# Altium PCB Buck Converter.PcbDoc
Units mm, origin at the board's own origin, x right, y up, seen from the top; angles counter-clockwise.
Board outline 50.25 x 28.75 mm, 2 copper layers (Top Layer, Bottom Layer), stack 1.571 mm thick; 6 components, 5 nets, 21 pads, 16 vias.
Unrouted connection lines stored in the file: 24.
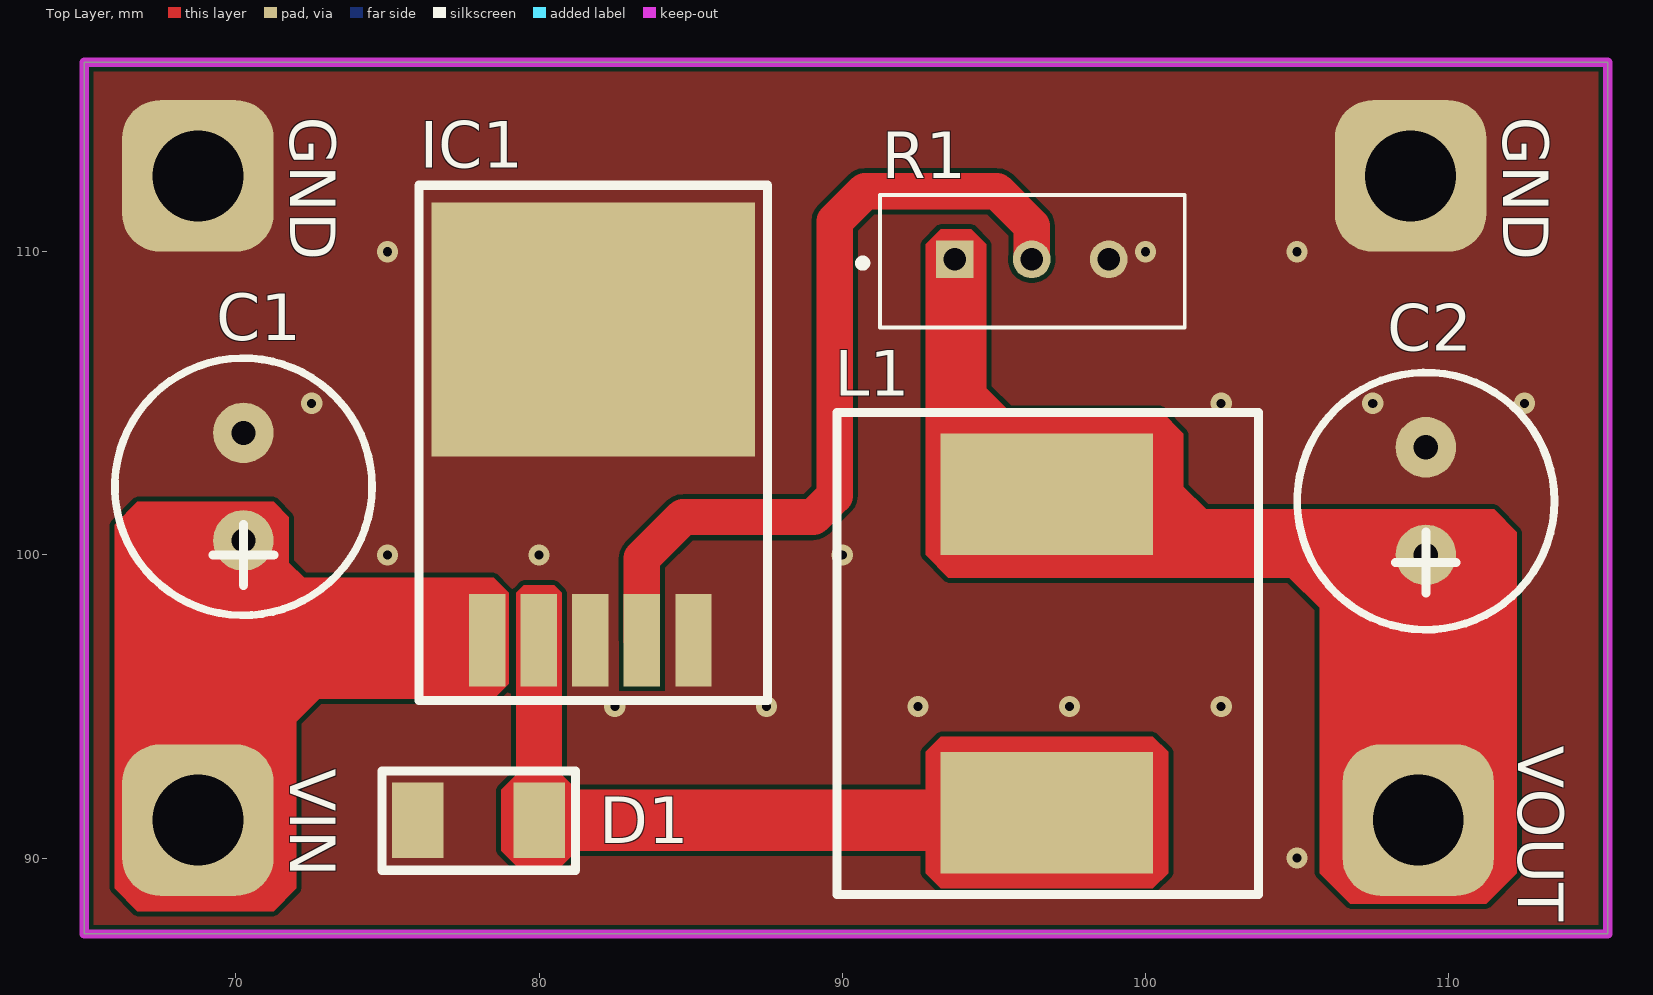
[diagram p0: Top Layer view]
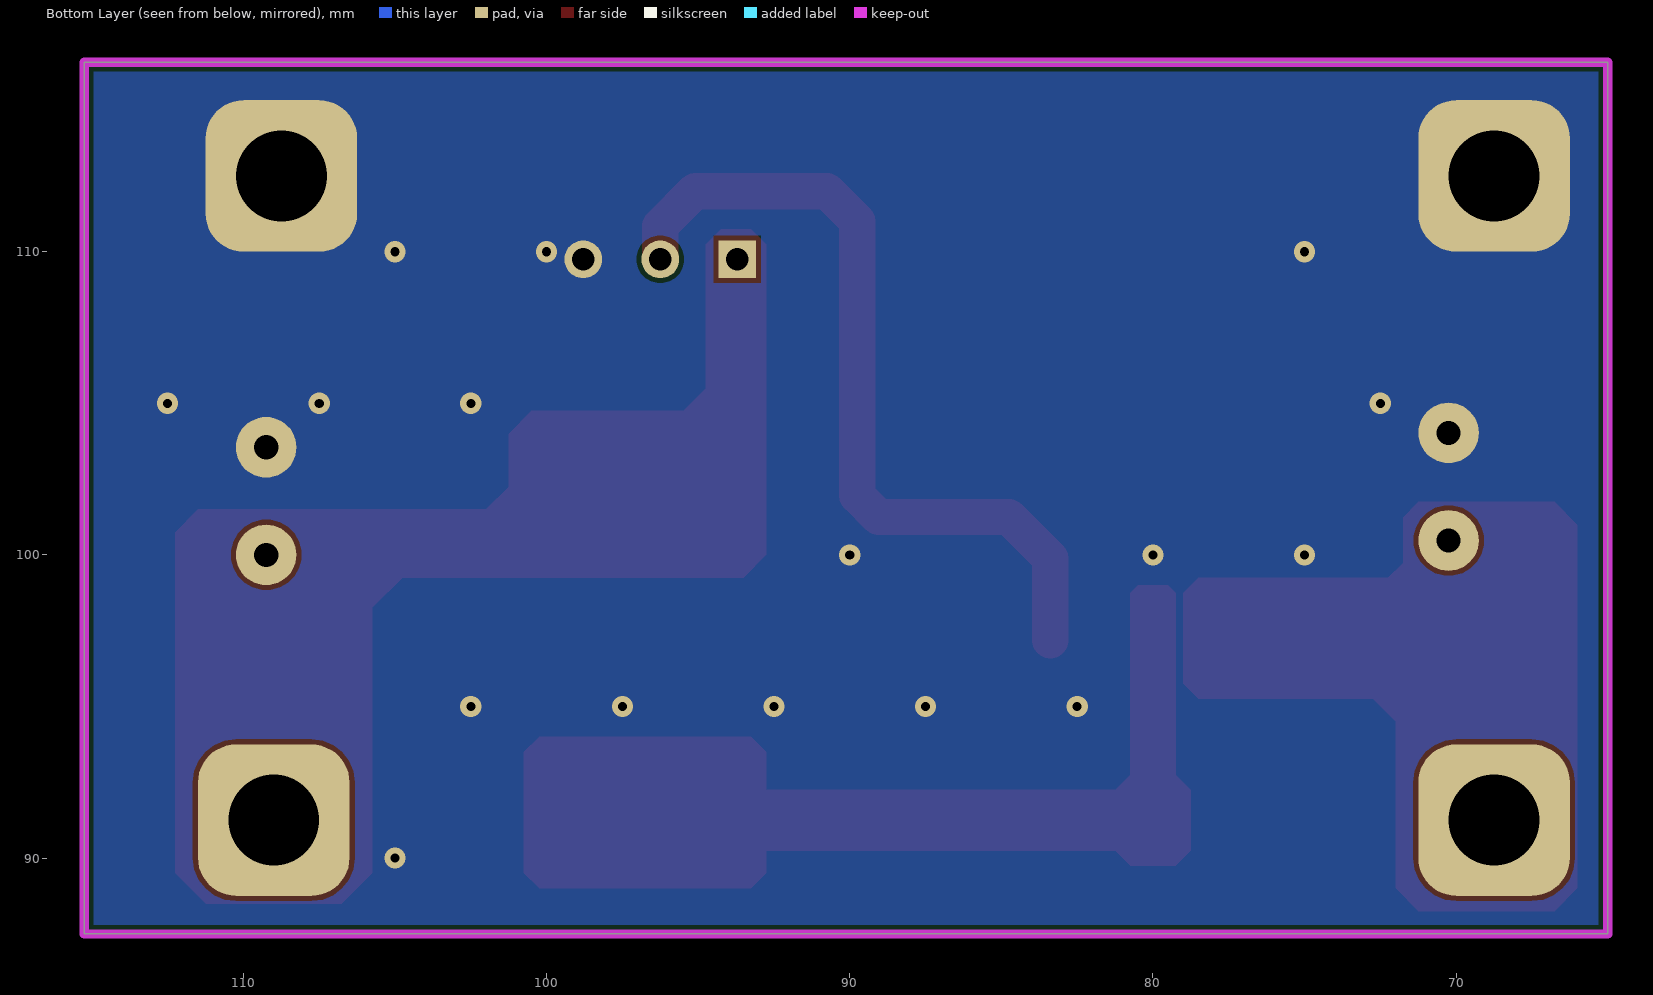
[diagram p1: Bottom Layer view, seen from below]
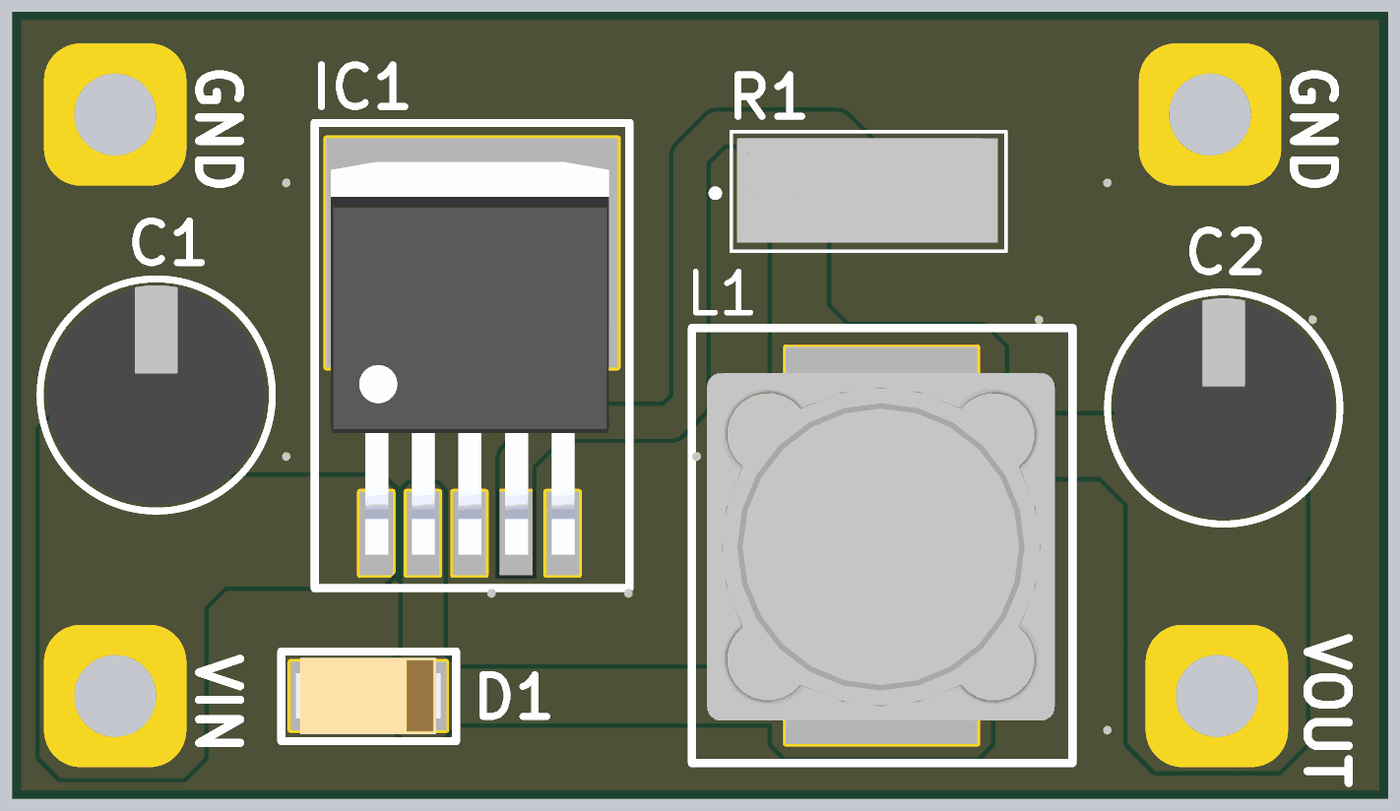
[diagram p2: 3D render of the assembled board from above, using the file's embedded part models]

## Layer stack, top to bottom
Top Solder: solder mask 0.0102, Solder Resist, Dk 3.5
Top Layer: signal copper 0.0356
Dielectric 1: dielectric 1.5, FR-4, Dk 4.8
Bottom Layer: signal copper 0.0356
Bottom Solder: solder mask 0.0102, Solder Resist, Dk 3.5

## Board outline
65,87.5 115.25,87.5 115.25,116.25 65,116.25

## Design rules (kind name [scope] priority, off if disabled: settings)
Clearance [All] p1: gap=0.152 ignorepadtopadclearanceinfootprint=FALSE
HoleSize [All] p1: absolutevalues=TRUE maxlimit=5 minlimit=0.025 maxpercent=80.000 minpercent=20.000
PolygonConnect [All] p1: thpad.connectstyle=Direct thpad.reliefconductorwidth=0.254 thpad.reliefentries=4 thpad.polygonreliefangle="90 Angle" thpad.airgapwidth=0.254 smdpad.connectstyle=Relief smdpad.reliefconductorwidth=0.5 smdpad.reliefentries=4 smdpad.polygonreliefangle="90 Angle" smdpad.airgapwidth=0.2 via.connectstyle=Direct via.reliefconductorwidth=0.254 via.reliefentries=4 via.polygonreliefangle="90 Angle" via.airgapwidth=0.254
RoutingVias [All] p1: holewidth=0.711 width=1.27 viastyle="Through Hole" minholewidth=0.711 minwidth=1.27 maxholewidth=0.711 maxwidth=1.27
SolderMaskExpansion [All] p1: expansion=0.102 istentingtop=FALSE
Width [All] p1: maxlimit=2 minlimit=0.152 preferedwidth=0.5
29 further rules are at their usual default settings.

## Components (designator, comment, footprint, x,y, rotation, side; value= is the part's Value field where it differs from the comment)
C1 "100uF" RADIAL-2 70.25,102.25 r90 top
C2 "220uF" RADIAL-2 109.25,101.775 r90 top
D1 "ACDBA560-HF" DO-214 78,91.25 r0 top
IC1 "LM2596" D2PAK 81.692,102.317 r0 top
L1 "33uH" SRR-1280 96.75,96.75 r90 top
R1 "100K" 3292W 96.25,109.75 r0 top

## Footprints (in the part's own frame and the unit in brackets; to place one, negate y for a bottom-side part, rotate by r counter-clockwise, add the part's x,y. Pads: shape width x height; smd on the part's side, far side on the other; paste and mask are expansions set on the pad)
3292W [mm]
  rect 1.248x1.248 / inner round 1.248 / far side rect 1.248x1.248 hole 0.74: 1(-2.54,0)
  round 1.248 hole 0.74: 2(0,0) 3(2.54,0)
  silkscreen extent -5.67,-2.25 5.05,2.12, body extent -4.78,-1.93 4.74,1.88, height 11.52
D2PAK [mm]
  rect 1.2x3.05 smd: 1(-3.404,-5.125) 2(-1.702,-5.125) 3(0,-5.125) 4(1.702,-5.125) 5(3.404,-5.125)
  rect 10.66x8.38 smd: 3(0.096,5.125)
  silkscreen extent -5.65,-7.12 5.85,9.88, body extent -5.06,-5.9 5.1,8.45, height 4.65
DO-214 [mm]
  rect 1.7x2.5 smd: 1(-2,0) 2(2,0)
  silkscreen extent -3.17,-1.65 3.2,1.63, body extent -2.64,-1.4 2.64,1.4, height 2.34
RADIAL-2 [mm]
  round 2 hole 0.8: 1(-1.775,0) 2(1.775,0)
  silkscreen extent -4.24,-4.24 4.24,4.24, body extent -4.02,-4 4.01,4, height 12.02
SRR-1280 [mm]
  rect 4x7 smd: 1(-5.25,0) 2(5.25,0)
  silkscreen extent -7.95,-6.98 7.95,6.93, body extent -6.4,-6.32 6.3,6.38, height 8.25

## Free pads (board coordinates)
  rrect50% 5x5 hole 3: ""(68.75,91.25) ""(68.75,112.5) ""(108.75,112.5) ""(109,91.25)

## Via types
v1: diameter 0.7, hole 0.3, Top Layer to Bottom Layer, tented both sides, 16 vias

## Nets (pads, with @x,y where several pads share a name; then routed paths per layer and width w, separated by ;. In a path a pad name is that pad's centre, name@x,y a point inside that pad or via, vN(x,y) a via of type N, cw(c..) or ccw(c..) an arc to the next point about the centre after c; other vN are vias at no path point)
FEEDBACK: IC1.4 R1.2 | length 27.4
  Top Layer w1.2: IC1.4 83.394,99.894 84.75,101.25 89.047,101.25 89.75,101.953 89.75,111 90.75,112 95.1,112 96.25,110.85 R1.2
GND: C1.2 C2.2 D1.1 IC1.3 IC1.5 pad.@68.75,112.5 pad.@108.75,112.5 R1.3
  other v1: 105,90 82.5,95 87.5,95 92.5,95 97.5,95 102.5,95 75,100 80,100 90,100 72.5,105 102.5,105 107.5,105 112.5,105 75,110 100,110 105,110
NetD1_2: D1.2 IC1.2 L1.1
VIN: C1.1 IC1.1 pad.@68.75,91.25
VOUT: C2.1 L1.2 pad.@109,91.25 R1.1

## Polygon pours and split planes (outlines as drawn)
GND on Bottom Layer "GND_L02_P000" (solid, pour order 0): 65,116.25 65,87.5 115.25,87.5 115.25,116.25
GND on Top Layer "GND_L01_P003" (solid, pour order 3): 65,116.25 65,87.5 115.25,87.5 115.25,116.25

## Keep-outs
Keep-Out Layer:
  lines w0.3: 65,87.5 77.562,87.5 102.688,87.5 115.25,87.5 115.25,116.25 65,116.25 65,87.5

## Other copper
Top Layer:
  region net VIN: 71.25,88.25 72,89 72,94.5 72.75,95.25 78.5,95.25 79,95.75 79,98.75 78.5,99.25 72.25,99.25 71.75,99.75 71.75,101.25 71.25,101.75 66.75,101.75 66,101 66,89 66.75,88.25
  region net VOUT: 92.75,110.25 93.25,110.75 94.25,110.75 94.75,110.25 94.75,105.5 95.5,104.75 100.5,104.75 101.25,104 101.25,102.25 102,101.5 111.5,101.5 112.25,100.75 112.25,89.5 111.25,88.5 106.75,88.5 105.75,89.5 105.75,98.25 104.75,99.25 93.5,99.25 92.75,100 92.75,109.75
  region net NetD1_2: 79.25,98.75 79.5,99 80.5,99 80.75,98.75 80.75,92.75 81.25,92.25 92.75,92.25 92.75,93.5 93.25,94 100.25,94 100.75,93.5 100.75,89.5 100.25,89 93.25,89 92.75,89.5 92.75,90.25 81.25,90.25 80.75,89.75 79.25,89.75 78.75,90.25 78.75,92.25 79.25,92.75

## Silkscreen, mask and mechanical layers (free items; w line width, h text height)
Top Overlay:
  lines w0.3: 69.25,100 71.25,100 ; 70.25,99 70.25,101 ; 108.25,99.75 110.25,99.75 ; 109.25,98.75 109.25,100.75
  text "GND" at 71.8,114.45 h1.5 r270
  text "GND" at 111.8,114.45 h1.5 r270
  text "VOUT" at 112.3,93.7 h1.5 r270
  text "VIN" at 71.8,92.95 h1.5 r270